# Altium PCB Biocoin_v1.3.PcbDoc (part 2 of 2)
Units mil, origin at the board's own origin, x right, y up, seen from the top; angles counter-clockwise.
Board outline 980.35 x 1027.62 mil, 6 copper layers (Top Signal, GND1, Middle Signal, Power, GND2, Bottom Signal), stack 37.008 mil thick; 101 components, 107 nets, 425 pads, 204 vias.
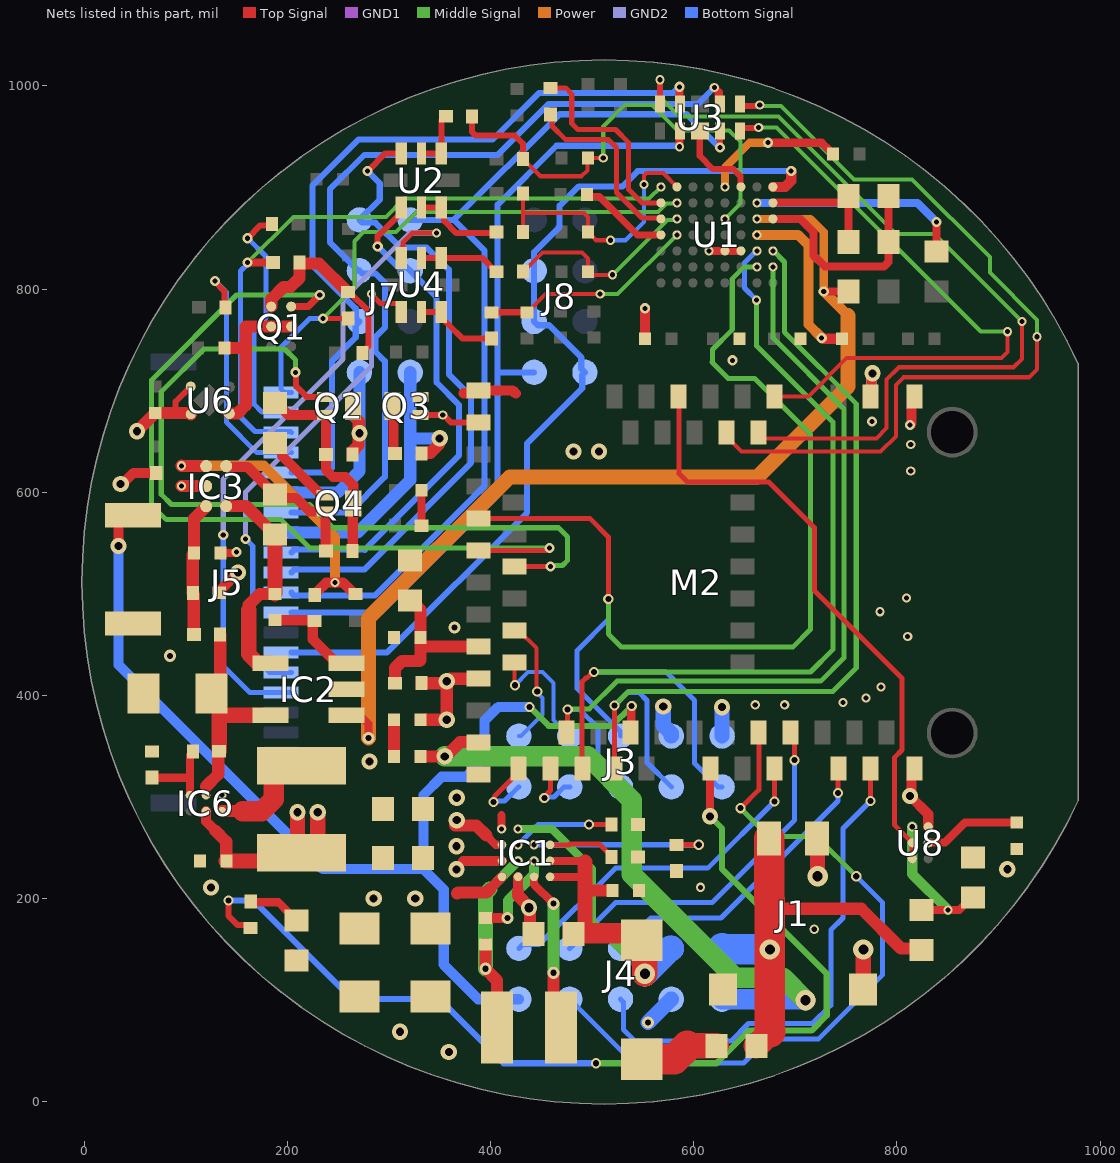
[diagram p6: the nets of this part, all layers, seen from the top]

## Via types
v1: diameter 9, hole 5, Top Signal to Bottom Signal, tented both sides, 75 vias
v2: diameter 10, hole 5, Top Signal to Bottom Signal, tented both sides, 45 vias
v3: diameter 16, hole 8, Top Signal to Bottom Signal, tented both sides, 34 vias
v4: diameter 10, hole 6, Top Signal to Bottom Signal, tented both sides, 22 vias
v5: diameter 12, hole 6, Top Signal to Bottom Signal, tented both sides, 11 vias
v6: diameter 9, hole 5, Top Signal to Bottom Signal, tented bottom, 6 vias
v7: diameter 20, hole 10, Top Signal to Bottom Signal, tented both sides, 5 vias
v8: diameter 10, hole 5, Top Signal to Bottom Signal, tented bottom, 3 vias
v9: diameter 16, hole 9, Top Signal to Bottom Signal, tented both sides, 1 vias
v10: diameter 14, hole 7, Top Signal to Bottom Signal, tented both sides, 1 vias
v11: diameter 14, hole 8, Top Signal to Bottom Signal, tented both sides, 1 vias

## Nets (pads, with @x,y where several pads share a name; then routed paths per layer and width w, separated by ;. In a path a pad name is that pad's centre, name@x,y a point inside that pad or via, vN(x,y) a via of type N, cw(c..) or ccw(c..) an arc to the next point about the centre after c; other vN are vias at no path point) (continued)
GND: C1.1 C5.2 C6.2 C15.2 C16.2 C17.2 C18.2 C19.2 C20.2 C22.2 C23.2 C24.2 C30.2 C31.2 C32.2 C36.2 C37.1 C39.1 D1.1 IC1.A4 IC1.B1 IC2.2 IC3.A2 IC6.B1 J1.2 J1.S1 J1.S2 J3.9 J3.10 M2.1 M2.2 M2.15 M2.33 M2.55 Q3.2 R3.1 R6.2 R14.2 R17.2 R20.1 R28.2 R30.2 S1.2 U1.E4 U1.E5 U1.E6 U8.A2 | length 653
  Top Signal w8: R20.1@64.11,346.91 65.09,346.91 R20.1@67,345 ; C37.1@134.09,540.07 148.53,540.07 149.46,541 v2(150,541) ; v1(135.75,301.87) IC6.B1@135.88,301.87 ; D1.1@204.02,146.32 D1.1@205,146.32 ; R28.2@332,567 C39.1@332,602 ; v1(411,268.62) 411,282 ; U1.E4@615,838 v1(615,837.57) U1.E5@630.75,837.57 U1.E6@646.5,837.57
  Top Signal w10: v3(36,608) 37.62,608 48.62,619 R30.2@71,619 ; 373.47,697.35 381.35,697.35 384.22,700.23 421.77,700.23 425,697 ; 427.13,206.87 IC1.B1@427.13,221.38 ; v2(552,781) 552.09,780.91 C5.2@552.09,751 ; M2.2@773.98,694.32 774.99,695.33 774.99,715.99 v3(776,717) ; v2(813,666) 814.51,667.51 M2.1@814.51,691.54 ; M2.1@814.42,691.45 M2.1@814.51,691.54 ; M2.55@815.06,333.83 816.45,333.83 M2.55@817.61,334.99 ; M2.55@817.29,328.18 814.42,325.31 814.42,304.04 813,302.62 v3(813,301) 830.87,283.13 U8.A2@830.87,270.75 ; M2.1@817.29,694.32 M2.1@814.51,691.54
  Top Signal w12: S1.2@48,470.79 S1.2@48.39,470.39 ; v1(96,606) IC3.A2@120.16,606 ; C18.2@305,340 C15.2@305,376 ; M2.33@382.35,320.4 384.22,322.28 M2.33@388.16,322.28 ; 427.13,206.87 427.13,202.96 438,192.08 v9(438,191) 438.77,190.23 438.77,170.81 442.32,167.26 C19.2@442.32,165
  Top Signal w15: J1.S1@629.1,110.69 J1.S1@629.55,111.14 ; J1.2@721.62,259.31 721.81,259.12 721.81,222.19 v7(722,222) ; J1.S2@766.9,110.69 J1.S2@766.9,110.69 766.95,149.95 v7(767,150)
  GND1 w10: 774,700 774.85,700.85 774.85,715.85 v3(776,717)
  GND2 w10: 774,699 774.85,699.85 774.85,715.85 v3(776,717)
  Bottom Signal w15: v3@570,388.73 570,370.71 578,362.71 J3.9@578,360 ; J3.10@628,360 v3(628,388.43)
  other v1: 718.65,169.84 606.78,211.14 660.59,390.76 689.59,390.76 747,393 769.46,397.39 784.46,408.39 810.65,457.84 783.46,482.39 809.65,495.84 813.65,620.84 813.65,646.84
  other v2: 775.4,669.44 638.31,729.83
  other v3: 359,49 311,69 125,211 908.76,228.93 281,335 570,389 481.77,640 506.77,640
  other v5: 84.53,438.94 364.53,466.94
IONTOPH_E1: J5.15 J7.5 Q2.3 R29.1 | length 224.4
  Top Signal w12: R29.1@264.09,637.89 264.09,640.06 270.23,646.2 v3@270.23,658.32 ; Q2.3@264.62,685 266.5,683.13 266.5,674.12 270.42,670.19 270.42,659.66 v3@271,659.08
  Bottom Signal w12: J5.15@204,599.58 249.58,599.58 271,621 J7.5@271,718
  other v3: 271,658
IONTOPH_E2: J5.13 J7.1 R27.1 | length 300
  Top Signal w12: R27.1@332,638 332,638.8 332.09,638.89 340.88,638.89 349.23,647.25 349.23,652.23 v3(350,653)
  Bottom Signal w12: J5.13@204,560.21 269.21,560.21 321,612 321,653 ; J7.1@321,718 321,653 ; v3@348.92,653 321,653
IONTOPH_NMOS_CTRL: M2.16 Q3.1 | length 60.3
  Top Signal w6: Q3.1@330.94,676.14 331.01,676.07 352.93,676.07 v6(353,676) 353.81,676 361.08,668.73 M2.16@388.16,668.73
IONTOPH_PMOS_CTRL: M2.23 Q2.1 | length 809.8
  Top Signal w5: M2.23@423.59,527 v2(459,527)
  Top Signal w6: v8(208,718) 208.77,717.23 208.77,704.23 219.14,693.86 Q2.1@237.06,693.86 ; M2.23@423.59,527 M2.23@424.09,526.5
  Middle Signal w5: v8(208,718) 208,730.3 197.3,741 118,741 76,699 76,598 86,588 222,588 245,565 467,565 476,556 476,533 470.96,527.96 459.96,527.96 v2(459,527)
LED: M2.44 R11.1 | length 1007.8
  Top Signal w6: v4(142,198) 142,182.97 151.07,173.91 161.09,173.91 R11.1@164,171
  Top Signal w8: v3(616,281) 616.25,281.25 616.25,327.93 M2.44@616.5,328.18
  Middle Signal w6: v4(504.01,38) 622.34,38 654.34,70 716,70 731,85 731,126 628,229 628,269 v3(616,281)
  Bottom Signal w6: v4(142,198) 167,198 264,101 350,101 413,38 v4(504.01,38)
MCU_RESET: J4.1 M2.40 S1.1 | length 1108.6
  Top Signal w8: M2.40@537.76,363.61 538.62,364.47 538.62,389.12 v4(539,389.5)
  Top Signal w10: v3(34,547) 34,570.21 41,577.21 S1.1@48,577.21
  Middle Signal w6: v4(438.46,388.74) 457.19,370 519.5,370 v4(539,389.5)
  Bottom Signal w10: v3(34,547) 34,430 235,229 334,229 ; J4.1@428,101 388,101 354,135 354,209 334,229 ; v4(438.46,388.74) 407.74,388.74 394.19,375.19 394.19,338.19 376,320 352,320 334,302 334,229
MCU_UART_RX: J4.6 M2.48 | length 343.1
  Top Signal w5: v4(679.44,295.67) M2.48@679.44,327.37
  Bottom Signal w5: J4.6@428,151 431.83,154.83 447.83,154.83 523,230 613.77,230 v4(679.44,295.67)
MCU_UART_TX: J4.7 M2.49 | length 364.2
  Top Signal w5: v4(699.17,336.25) M2.49@699.17,367.94
  Bottom Signal w5: J4.7@478,151 523,196 618,196 699.17,277.17 v4(699.17,336.25)
MCU_VDD: C16.1 C17.1 M2.28 R1.2 | length 171.6
  Top Signal w12: R1.2@305.7,412.3 R1.2@306,412 306,426.97 313.03,434 330.05,434 331,434.95 331,445.97 ; C16.1@316.61,497.7 C16.1@321,493.32 321.98,493.32 331,484.3 C17.1@331,457 331,445.97 ; M2.28@388.16,448.26 333.29,448.26 331,445.97
  Top Signal w15: M2.28@387.78,447.89 M2.28@388.16,448.26
MUXA0: M2.7 U3.1 | length 818.2
  Top Signal w4: M2.7@632.25,658.89 632.25,654.95 647.13,640.08 784.08,640.08 799,655 799,705.62 806.52,713.13 930.13,713.13 938,721 v1(938,753)
  Top Signal w6: U3.1@645.38,980.19 663.65,980.19 664.46,981 v1(665,981)
  Middle Signal w4: v1@666.08,981 v1(665,981) 665.77,980.23 685.78,980.23 758.02,908 815,908 891.5,831.5 891.5,816.18 938,769.68 v1(938,753)
MUXA1: M2.4 U3.10 | length 619.4
  Top Signal w4: M2.4@679.5,694.32 712.9,694.32 750.58,732 903,732 909,738 v1(909,758)
  Top Signal w6: U3.10@646.19,954.62 645.38,953.81 645.38,956.62 647.38,958.62 663.62,958.62 v1(664,959)
  Middle Signal w4: v1(664,959) 681.56,959 882.56,758 v1(909,758)
MUXEN: M2.5 U3.5 | length 849.6
  Top Signal w4: M2.5@663.75,658.89 669.62,653 780,653 790,663 790,711 802,723 915,723 923,731 v1(923,768)
  Top Signal w6: U3.5@566.62,980.19 566.81,980.38 566.81,1005.81 v1(567,1006)
  Middle Signal w4: v1(567,1006) 567,989 586,970 683.29,970 799.29,854 837,854 v1(923,768)
NetC21_1: C21.1 IC1.B2 L3.2 | length 219.8
  Top Signal w12: C21.1@395,155 v5(395,131) 406.5,119.5 L3.2@406.5,73 L3.2@396.76,82.75
  Middle Signal w10: 399.35,209.35 v1(427,237)
  Middle Signal w15: v5(395,131) 395,205 399.35,209.35
NetC21_2: C21.2 IC1.C2 | length 88.7
  Top Signal w10: C21.2@395,181 v5(416.85,181)
  Middle Signal w10: v5(416.85,181) 417.23,181.38 417.23,198.23 443,224 v1(443,237)
NetC38_1: C38.1 IC2.3 R23.1 | length 99
  Top Signal w10: C38.1@188,474 225.02,474 225.02,455.23 248.65,431.59 IC2.3@258.4,431.59
NetC38_2: C38.2 IC2.4 IC3.B1 RSENSE.1 | length 222.3
  Top Signal w12: IC3.B1@139.84,586.32 159.37,586.32 182.19,563.5 182.19,563.14 187.33,558 RSENSE.1@187.68,558 ; 162,484 162,489 172.91,499.91 187.91,499.91 C38.2@188,500
  Top Signal w15: 162,484 162,440.75 170.79,431.96 183.22,431.96 IC2.4@183.6,431.59 ; C38.2@188,500 RSENSE.1@188,558.32
NetD1_2: D1.2 R11.2 | length 52.9
  Top Signal w8: R11.2@164,196.41 191.28,196.41 201.19,186.5 201.19,185.51 208.02,178.68 D1.2@209,178.68
NetIC1_B3: IC1.B3 R6.1 | length 100.3
  Top Signal w5: v4(497,273) R6.1@519,273
  Bottom Signal w5: v1(427,253) 427.06,253 447.06,273 v4(497,273)
NetIC1_C1: IC1.C1 L3.1 | length 168.6
  Top Signal w8: IC1.C1@442.87,221.38 442.97,221.28 442.97,214.03 v5(462,195)
  Top Signal w12: v5(462,127) 462,80.5 L3.1@469.5,73
  Top Signal w15: L3.1@469.5,73 L3.1@476,79.5
  Middle Signal w12: v5(462,127) v5(462,195)
NetIC1_C3: IC1.C3 R17.1 | length 184
  Top Signal w5: R17.1@583,253 v4(605,253)
  Bottom Signal w5: v1(443,253) v4(605,253)
NetIC1_D3: IC1.D3 R14.1 | length 66.5
  Top Signal w5: IC1.D3@458.62,252.87 477.29,252.87 478.04,253.63 507.36,253.63 519,241.98 R14.1@519,241
NetIC3_A3: IC3.A3 R23.2 R25.1 | length 299.2
  Top Signal w10: R23.2@227,499 228.3,500.3 228.3,500.89 238.41,511 v1(247,511) 255.02,511 266.02,500 R25.1@267,500
  Top Signal w12: v1(96,626) 96.13,625.87 119.97,625.87 IC3.A3@120.16,625.68
  Power w10: v1(96,626) 177,626 247,556 v1(247,511)
NetIC3_B3: IC3.B3 Q4.2 R24.2 RSENSE.2 | length 155.9
  Top Signal w10: IC3.B3@139.84,625.68 140.41,625.11 142.53,625.11 142.73,624.92 160.77,624.92 181.19,604.5 181.19,603.51 190.28,594.42 208.58,594.42 222,581 237.44,581 237.5,580.94 237.5,542.5 R24.2@238,542
NetIC6_A1: IC6.A1 L1.2 | length 111.4
  Top Signal w12: IC6.A1@135.75,286.13 155.87,286.13 156,286
  Top Signal w20: 156,286 175,286 186.72,297.72 186.72,322.5 195.13,330.91 L1.2@214,330.91
NetIC6_B3: IC6.B3 R18.1 R20.2 | length 82.6
  Top Signal w8: R20.2@67,319 101.68,319 104.25,321.57 ; IC6.B3@104.25,301.87 104.25,321.57 ; R18.1@107,345 107,344.02 104.25,341.27 104.25,321.57
NetQ2_2: Q2.2 Q4.3 R24.1 R26.2 R29.2 | length 207.6
  Top Signal w10: R26.2@188,688 188.98,688 200.84,676.14 Q2.2@237.06,676.14 237.92,676.14 238,676.06 R29.2@238,637 238,622 245,615 257,615 265,607 Q4.3@265,589 264.5,588.5 264.5,542.5 R24.1@264,542
NetQ3_3: Q3.3 R27.2 | length 49.1
  Top Signal w10: Q3.3@303.38,685 304.69,683.69 304.69,639.3 R27.2@306,638 R27.2@306.69,637.31
NetQ4_1: Q4.1 R26.1 | length 74.5
  Top Signal w10: R26.1@188,648.63 188.98,648.63 194.81,642.8 194.81,635.79 233.6,597 Q4.1@237,597
NetR2_1: R2.1 R3.2 U8.A1 | length 152.8
  Top Signal w8: R2.1@824,188.68 861.39,188.68 874.02,201.32 R3.2@875,201.32
  Middle Signal w10: v1(815.13,270.75) 815.13,224.08 v1(850.44,188.77)
NetR4_2: R4.2 U2.1 U2.2 | length 57.7
  Top Signal w6: U2.2@332,933.57 U2.1@351.68,933.57 351.68,966.28 R4.2@355.41,970
NetR7_2: R7.2 U2.6 U2.7 | length 91.1
  Top Signal w6: U2.6@332,880.43 U2.7@351.68,880.43 354.34,877.78 354.34,867.19 366.52,855 405,855 R7.2@406,856
NetR21_2: R21.2 U4.1 U4.2 | length 79.6
  Top Signal w6: U4.2@332,830.57 391.83,830.57 405.41,817 R21.2@406,817
NetR22_2: R22.2 U4.6 U4.7 | length 83.1
  Top Signal w6: U4.6@332,777.43 U4.7@351.68,777.43 351.68,772.25 359.1,764.83 359.1,764.6 372.61,751.09 R22.2@401,751.09
PH0: J5.11 J7.8 U2.3 | length 631.1
  Top Signal w6: v2(279,916) 296.57,933.57 U2.3@312.32,933.57
  Bottom Signal w6: J5.11@204,520.84 206.91,523.75 275.75,523.75 381,629 381,694 359,716 359,819 337,841 311,841 286.7,865.3 273.7,865.3 J7.8@271,868 291,888 291,904 v2(279,916)
PH0_Amp_Out: C12.1 R4.1 R5.1 U1.C5 | length 457.2
  Top Signal w4: R5.1@432,928 432,927.02 435.91,923.11 436.89,923.11 449,911 489.66,911 495.36,916.7 495.36,926.36 498,929 v1(511,929)
  Top Signal w6: R4.1@382,970 382,954.51 385.51,951 423.99,951 432,942.99 R5.1@432,928
  Middle Signal w4: v1(511,929) 511,960 532,981 559,981 584,956 635,956 646,945 646,884.32 v1(630.75,869.06) v1@630.75,868.75
PH1: J5.12 J7.3 U2.5 | length 496.6
  Top Signal w6: v2(289,842) 289,851.93 312.32,875.25 U2.5@312.32,880.43
  Bottom Signal w6: J5.12@204,540.53 206.91,543.43 276.02,543.43 276.22,543.22 369,636 369,686 347,708 347,792 J7.3@321,818 317.36,821.64 309.36,821.64 v2(289,842)
PH1_Amp_Out: C27.1 R7.1 R8.1 U1.A2 | length 269.4
  Top Signal w4: R7.1@432,856 432,875 ; R8.1@432,894 432,875 ; v1(518,848) 504,848 500.3,851.7 499.91,851.7 496,855.61 C27.1@496,856 496,871 493.99,873.01 492,875 432,875 ; v1(551,903) 551,911.66 553.34,914 570.06,914 U1.A2@583.5,900.56
  Bottom Signal w4: v1(518,848) 533,848 551,866 v1(551,903)
PH2: J5.6 U4.5 | length 495.8
  Top Signal w5: v1(283,795) 283,794.54 291.78,785.75 309.16,785.75 312.32,782.6 U4.5@312.32,777.43
  GND2 w5: v2(159,554) 159,600 283,724 v1(283,795)
  Bottom Signal w5: v2(159,554) 166,547 166,437.73 174.03,429.7 175.35,429.7 182.63,422.42 J5.6@194,422.42 J5.6@204,422.42
PH2_Amp_Out: C34.1 R22.1 U1.D2 | length 214.5
  Top Signal w4: C34.1@436,777.09 436.39,777.09 454.3,795 v1(508,795)
  Top Signal w6: R22.1@401,777.09 C34.1@436,777.09
  Middle Signal w4: v1(508,795) 525.19,795 v1(583.5,853.32)
  Bottom Signal w6: v1@583.19,853 v1(583.5,853.32)
PH3: J5.5 U4.3 | length 659.5
  Top Signal w5: U4.3@312.32,830.57 313.97,832.23 313.97,845.97 323,855 v1(347,855)
  GND2 w5: v2(137,558) 137,613 255,731 255,790 320,855 v1(347,855)
  Bottom Signal w5: v2(137,558) 137,429 163.27,402.73 J5.5@204,402.73
PH3_Amp_Out: C33.1 R21.1 U1.C2 | length 199.1
  Top Signal w4: R21.1@432,817 432,817.98 435.91,821.89 436.89,821.89 451,836 490,836 491.99,834.01 496,830 C33.1@496,817.39 ; C33.1@496,817 C33.1@496,817.39 ; v1(520,814) 499.39,814 C33.1@496,817.39
  Middle Signal w4: v1(520,814) 574.04,868.04 582.04,868.04 v1@583,869
  other v1: 583.5,869
RC0_0: CTIA1.1 RTIA1.1 U1.C8 | length 215.1
  Top Signal w8: U1.C8@678.18,868.87 U1.C8@677.99,869.06 704.94,869.06 718,856 718,833 729,822 787.25,822 791.94,826.69 CTIA1.1@791.94,846.32 ; CTIA1.1@791,845.38 CTIA1.1@791.94,846.32 ; RTIA1.1@791.94,891.32 CTIA1.1@791.94,846.32
RC0_1: CTIA1.2 RTIA1.2 U1.B8 | length 122.3
  Top Signal w8: U1.B8@677.99,884.81 678.18,885 746.25,885 RTIA1.2@752.57,891.32 CTIA1.2@752.57,846.32
RCAL0: RCAL1.2 U1.C1 | length 183.1
  Top Signal w5: RCAL1.2@459,972 460.46,970.54 460.46,960.54 474,947 516.17,947 524,939.17 524,895 549.17,869.83 566.99,869.83 U1.C1@567.76,869.06
RCAL1: RCAL1.1 U1.B1 | length 197.6
  Top Signal w5: RCAL1.1@461,998 474,998 480,992 480,963 486,957 523.08,957 536,944.08 536,898 549.19,884.81 U1.B1@567.76,884.81
RE0: J5.7 J8.1 J8.6 J8.7 U1.A8 | length 924.3
  Top Signal w10: U1.A8@677.99,900.56 690.14,900.56 696,906.42 v2(696,916)
  Bottom Signal w6: J5.7@204,442.1 298.1,442.1 436,580 436,648 490.3,702.3 490.3,715.3 J8.1@493,718 489.36,721.64 489.36,732.64 457.64,764.36 446.64,764.36 J8.6@443,768 J8.7@443,818 443,836.22 468,861.22 468,882 487,901 530,901 545,916 v2(696,916)
SCL: J3.6 M2.27 | length 128.4
  Top Signal w4: M2.27@423.59,464.01 427.53,464.01 445.1,446.44 445.1,404.9 v4(446,404)
  Bottom Signal w4: J3.6@428,360 430,360 451,381 451,397.38 446,402.38 v4(446,404)
SDA: J3.7 M2.29 | length 129.2
  Top Signal w4: M2.29@423.59,432.51 423.59,410.41 v4(424,410)
  Bottom Signal w4: v4(424,410) 437,423 451,423 462,412 462,376 J3.7@478,360
SE0: U1.A6 U3.8 | length 81.7
  Top Signal w6: U3.8@606,953.81 606,931 619,918 639,918 646,911 646,901.06 U1.A6@646.5,900.56
SPI_Board_CLK: J3.3 M2.36 U1.F8 | length 834.2
  Top Signal w5: M2.36@474.77,363.61 476,364.84 v4(476,386)
  Middle Signal w5: v4(476,386) 476.82,386.82 497.32,386.82 524.5,414 725,414 748,437 748,682 677.99,752.01 v1@677.99,821.64
  Bottom Signal w5: v4(476,386) 488,386 506,368 506,332 J3.3@528,310
  other v1: 677.99,821.82
SPI_Board_CS: J3.8 M2.20 U1.F7 | length 1046
  Top Signal w5: M2.20@388.16,574.24 497.76,574.24 516,556 v4(516,495)
  Middle Signal w5: v4(516,495) 516,460.5 529,447.5 697.5,447.5 715,465 715,657 660,712 634,712 618,728 618.5,728.5 618.5,740.5 638,760 638,810 649.82,821.82 v1(662.24,821.82)
  Bottom Signal w5: v4(516,495) 516,475 485.07,444.07 485.07,407.07 528,364.14 J3.8@528,360
SPI_Board_MISO: J3.4 M2.39 U1.E8 | length 895.8
  Top Signal w5: M2.39@522.01,328.18 v4(522,390)
  Middle Signal w5: v4(522,390) 522,390.18 535.75,403.93 736.93,403.93 760,427 760,687 689.49,757.51 689.49,826.58 678.51,837.57 v1(677.99,837.57)
  Bottom Signal w5: v4(522,390) 522,390.18 534.82,403 546,403 554,395 554,334 J3.4@578,310
SPI_Board_MOSI: J3.5 M2.37 U1.E7 | length 989
  Top Signal w5: M2.37@490.52,328.18 490.14,328.56 490.14,413.47 493.68,417 494.65,417 500.65,423 v4(502,423)
  Middle Signal w5: v4(502,423) 715,423 737,445 737,669 662,744 v1(662,789) ; v1@661.73,837.57 v1(662.24,837.57)
  Bottom Signal w5: v4(502,423) 573,423 601,395 601,333 624,310 J3.5@628,310 ; v1(662,789) 650,801 650,825.84 661.73,837.57 v1(662.24,837.57)
STRAIN+: J5.20 R10.2 U1.B2 | length 552.6
  Top Signal w5: v2(235,771) R10.2@260,771
  Middle Signal w4: v2(235,771) 266,802 266,847 275,856 307,856 327,876 565,876 573,884 582.7,884 v1(583.5,884.81)
  Bottom Signal w5: J5.20@204,698.01 197.41,698.01 194,701.41 194,743 222,771 v2(235,771)
STRAIN-: J5.19 R16.1 | length 246.3
  Top Signal w6: v2(161,850) 173.61,862.61 183.61,862.61 R16.1@185,864
  Bottom Signal w5: v2(161,850) 179,832 179,772 167,760 167,687 175,679 203.32,679 204,678.32 J5.19@203.68,678
SWCLK: J4.3 M2.53 | length 503.6
  Top Signal w5: v4(774,296) M2.53@773.98,328.18
  Bottom Signal w5: J4.3@528,101 531,98 531,71 542,60 637,60 654,77 717,77 735,95 735,169 747,181 747,269 v4(774,296)
SWDIO: J4.8 M2.51 | length 306.4
  Top Signal w5: v4(742,304) 742,327.69 M2.51@742.49,328.18
  Bottom Signal w5: J4.8@528,151 557.91,180.91 626.91,180.91 742,296 v4(742,304)
SWO: J4.2 M2.47 | length 696.2
  Top Signal w5: v4(646,289) 664.17,307.17 664.17,313.21 664.12,313.26 664.12,343.1 664.17,343.15 M2.47@664.17,357.94
  Middle Signal w5: v4(646,289) 674,261 721,261 v4(760,222)
  Bottom Signal w5: J4.2@478,101 541,38 649,38 673,62 723,62 786,125 786,196 v4(760,222)
TEMP+: J5.18 R9.2 U1.A1 | length 674
  Top Signal w8: v2(161,826) R9.2@186,826 R9.2@185.92,825.92
  Middle Signal w4: v2(161,826) 206,871 297,871 315,889 556.2,889 v1(567.76,900.56)
  Bottom Signal w5: v2(161,826) 161,824.65 154,817.65 154,674 168.29,659.71 202.93,659.71 J5.18@204,658.64
TEMP-: J5.17 R15.1 | length 250.1
  Top Signal w6: v2(129,808) 129,806.92 138.03,797.89 138.03,782.97 R15.1@139,782
  Bottom Signal w5: v2(129,808) 140,797 140,669 170.05,638.95 J5.17@204,638.95
TEMP_VDD: Q1.A1 R9.1 R10.1 R31.1 | length 190
  Top Signal w6: R10.1@260,797 260.98,797 280,777.98 280,743.98 274,737.98 R31.1@274,737
  Top Signal w12: Q1.A1@184.16,782.68 184.16,789.97 196.19,802 203,802 211.91,810.91 R9.1@211.91,825.3 ; R9.1@212,826 211.91,825.91 R9.1@211.91,825.3 ; R10.1@260,797 259.2,797 231.09,825.11 212.09,825.11 R9.1@211.91,825.3
TEMP_VDD_CTRL: M2.22 Q1.A2 | length 835.8
  Top Signal w5: M2.22@388.16,542.75 454.39,542.75 456.65,545 v2(458,545)
  Top Signal w7: Q1.A2@203.84,782.68 220.68,782.68 v8(232,794)
  Middle Signal w5: v8(232,794) 150,794 66.5,710.5 66.5,587.5 81,573 194,573 222,545 v2(458,545)
USB_+5V: C18.1 J4.5 M2.32 | length 642.6
  Top Signal w12: C18.1@331,340 v3(355,340) 356.08,340 370.08,354 387.93,354 M2.32@388.16,353.77
  Middle Signal w20: v3(355,340) 496,340 539,297 539,224 641,122 688,122 v7(710,100)
  Bottom Signal w20: J4.5@628,101 709,101 v7(710,100)
USB_N: J3.1 M2.34 | length 80.9
  Top Signal w5: v4(403,295) 403.96,295.96 403.96,300.67 427.53,324.24 M2.34@427.53,328.18 M2.34@432,332.65
  Bottom Signal w5: v4(403,295) 403.96,295.96 413.76,295.96 427.8,310 J3.1@428,310
USB_P: J3.2 M2.35 | length 68.8
  Top Signal w5: v4(453,299) 453,300.35 459.02,306.38 M2.35@459.02,328.18 M2.35@453.65,322.81
  Bottom Signal w5: v4(453,299) 453.96,299.96 462.54,299.96 472.59,310 J3.2@478,310
VBAT: J1.1 J4.10 R2.2 R13.2 | length 424
  Top Signal w12: 674.38,199 674.69,199 ; 674.69,190 765,190 804,151 822.32,151 R2.2@824,149.32
  Top Signal w25: R13.2@661.68,55 675.18,68.49
  Top Signal w30: 674.38,199 J1.1@674.38,259.31 ; 674.69,199 674.69,150.31 v7(675,150) 675,68.67 675.18,68.49
  Bottom Signal w30: J4.10@628,151 629,150 v7(675,150)
VBIAS0: C11.2 IC2.1 U1.C7 | length 986.3
  Top Signal w8: IC2.1@258.4,380.41 262.03,376.79 275.31,376.79 280,372.1 v5(280,358) ; v2(727.99,797.65) C11.2@757.56,797.65
  Power w8: v1(662.24,869.06) 714.94,869.06 727.99,856.01 v2(727.99,797.65)
  Power w10: v2(727.99,797.65) 752,773.64
  Power w15: v5(280,358) 280,476 419,615 663,615 752,704 752,773.64
VBIAS_CAP: C10.2 U1.D1 | length 89.2
  Top Signal w7: C10.2@495,893 497.03,890.97 507.03,890.97 544.69,853.32 U1.D1@567.76,853.32
VBUS: C19.1 C20.1 C30.1 IC1.B4 IC1.D1 IC1.D2 IC6.A2 J2.1 J4.9 L1.1 | length 730.5
  Top Signal w8: IC1.D1@458.62,221.38 492,221.38 ; IC1.D2@458.62,237.13 484.87,237.13 485,237 494,237
  Top Signal w10: IC6.A2@120,286.13 120,276 129,267
  Top Signal w12: 129,267 140,256 C30.1@140,237 ; 493,208 C20.1@520,208
  Top Signal w15: C30.1@140,237 205.91,237 L1.1@214,245.09 210,249.09 v3(210,285) ; v3(230,285) 230,254.09 L1.1@236,248.09 ; C19.1@481.68,165 482.68,166 C19.1@482.68,166.98 ; 493,165 493,166 493,208 493,236
  Top Signal w20: C19.1@482.68,166 493,166 546,166 J2.1@551,161
  Top Signal w25: v7(552,126) J2.1@552,151
  Middle Signal w8: v1(427.13,268.62) 460.38,268.62 500,229 500,178 v7(552,126)
  Bottom Signal w25: v7(552,126) 577,151 J4.9@578,151
VDD: C15.1 C31.1 C32.1 IC1.A3 J4.4 M2.30 R1.1 U8.B2 | length 304.4
  Top Signal w8: 396,262 405.03,252.97 411.28,252.97 IC1.A3@411.38,252.87 ; v1(830.87,255) 831.07,255.19 847.19,255.19 867,275 C32.1@918,275
  Top Signal w12: C15.1@331,376 v3(357,376) v3(357,414) ; R1.1@332,412 353.92,412 355.92,414 v3(357,414) ; v3@365,272 386,272 396,262 ; M2.30@387.78,416.39 360.47,416.39 358.08,414 v3(357,414)
  Top Signal w15: M2.30@387.78,416.39 M2.30@388.16,416.76
  Bottom Signal w15: v5(555,78) J4.4@578,101
  other v3: 366.8,277.21 366.8,299.21
VDD_AUX: C24.1 IC1.A2 R12.2 | length 66.3
  Top Signal w10: R12.2@133,501 133.59,501 134.89,502.3 134.89,504.39 v3(151.5,521) ; 373.13,237.13 IC1.A2@411.38,237.13
  other v3: 366.63,228.83 366.6,251.49
VDD_BOOSTOUT: C36.1 IC2.5 IC6.B2 R18.2 R19.1 | length 196.2
  Top Signal w8: IC6.B2@120,301.87 120,310.29
  Top Signal w12: 120,310.29 132.11,322.4 132.11,344.7 132.41,345 R18.2@133,345 ; C36.1@125.46,402 134,410.54 R19.1@134,460
  Top Signal w15: R18.2@133,345 133,380 133.41,380.41 IC2.5@183.6,380.41
VDD_LDOIN: C22.1 C23.1 C29.1 IC1.A1 U6.3 U6.4 | length 148.4
  Top Signal w6: 90,678 90,689 U6.3@105,704
  Top Signal w10: 400,210 IC1.A1@411.38,221.38
  Top Signal w12: v3(52,660) 69.7,677.7 69.7,677.91 69.8,678 90,678 103.79,678 U6.4@105,676.79 ; 367,205 368,206 396,206 400,210
  Top Signal w15: C22.1@341,170.46 C22.1@344.94,170.46
  other v3: 285,200 326,200
VDD_LDOOUT: C28.1 Q1.B1 Q1.B2 U6.1 | length 160.8
  Top Signal w12: C28.1@138,742 159.07,742 ; U6.1@142.96,677.4 150.97,677.4 159.07,685.5 159.07,742 ; 159,763 Q1.B1@184.16,763 Q1.B2@203.84,763 ; 159.07,760.93 159.07,742
VDD_Sense: C37.2 IC3.A1 R12.1 R19.2 | length 132.2
  Top Signal w12: R19.2@108,460 108,499.2 107,500.2 R12.1@107,501 107,538.77 108.09,539.87 C37.2@108.09,540.07 108.09,573.98 120.16,586.05 IC3.A1@120.16,586.32
VDIV: M2.10 U8.B1 U8.C1 | length 603.6
  Top Signal w5: M2.10@585.01,694.32 585.38,693.95 585.38,618.62 594,610 674,610 719,565 719,503 805.11,416.89 805.11,346.29 797.5,338.68 797.5,272.63 U8.B1@815.13,255 U8.C1@815.13,239.25
VIN: J2.2 R13.1 | length 78.7
  Top Signal w25: 593.89,55 R13.1@622.32,55
  Top Signal w30: J2.2@549,42 580.89,42 593.89,55
VREF_1V8: C8.2 U1.A5 | length 140.3
  Top Signal w8: v2(673,944) 726,944 734.7,935.3 735.09,935.3 737,933.39 C8.2@737,933
  Power w8: v1(630.75,900.5) 630.75,919.75 655,944 v2(673,944)
VREF_2V5: C7.2 U1.D7 | length 171.9
  Top Signal w10: v2(726,751.87) 726.87,751 C7.2@746.09,751
  Power w10: v1(662.24,853.32) 702.68,853.32 713,843 713,803.87 712.99,765.01 v2@726,752
VZERO0: C9.2 U1.B7 | length 214.1
  Top Signal w8: C9.2@839,836.75 v2(839,866) v2@839,866.32
  Bottom Signal w8: v1(662.24,884.81) 820.19,884.81 v2(839,866)
WE1: J5.14 J7.7 U3.2 | length 872.9
  Top Signal w8: v1(620.31,998.32) 620.31,998.05 624.69,993.68 U3.2@624.69,987.69 ; U3.2@625.65,979.57 625.37,981.93 625.23,983.13 U3.2@625.16,983.72 ; U3.2@625.69,983.19 U3.2@625.16,983.72 ; U3.2@624.69,987.69 624.69,984.19 U3.2@625.16,983.72 ; U3.2@624.69,987.69 U3.2@625.16,983.72
  Bottom Signal w6: J5.14@204,579.9 260.9,579.9 296,615 296,729 287,738 287,753 296,762 296,806 286.7,815.3 273.7,815.3 J7.7@271,818 270.07,818 242,846.07 242,898 276,932 407,932 457,982 603.99,982 v1(620.31,998.32)
WE2: J5.9 J8.5 U3.7 | length 790.2
  Top Signal w8: v1(586,940) 586.16,940.16 586.16,953.24 U3.7@586.27,953.35
  Bottom Signal w6: J5.9@204,481.47 291.47,481.47 407,597 407,717 ; J8.5@443,718 408,718 407,717 ; v1(586,940) 585.43,940.57 583.3,940.57 582.88,941 465,941 407,883 407,717
WE3: J5.16 J7.6 U3.4 | length 770.3
  Top Signal w8: v2(586,999) 586.16,998.84 586.16,980.34 U3.4@586.31,980.19
  Bottom Signal w6: J5.16@204,619.27 239.27,619.27 244,624 244,729 267.36,752.36 267.36,764.36 J7.6@271,768 267.36,771.64 267.36,780.64 225,823 225,902 270,947 402,947 448,993 580,993 v2(586,999)
WE4: J5.10 J7.4 U3.9 | length 888.3
  Top Signal w6: v2(626,939.23) U3.9@626,955.62
  Bottom Signal w6: J5.10@204,501.16 206.91,498.25 286.25,498.25 394,606 394,838 364,868 ; J7.4@321,868 364,868 ; v2(626,939.23) 625.77,939.23 593,972 468,972 364,868
pads on no net: J5.1 J5.S1 J5.S2 J7.2 M2.3 M2.6 M2.8 M2.9 M2.17 M2.18 M2.31 M2.42 M2.43 M2.45 M2.46 M2.50 M2.52 M2.54 M2.56 M2.57 M2.58 M2.59 M2.60 M2.61 U1.C3 U1.C6 U1.D3 U1.D4 U1.F4 U1.F6 U1.G1 U1.G4 U1.G5 U1.G6 U1.G8 U8.C2

## Polygon pours and split planes (outlines as drawn)
GND on Top Signal "Top Signal-GND 1" (solid, remove dead copper, pour order 111): 513.94,9.98 ccw(c507.96,522.58) 959.04,279 959.04,711.13 711,711.13 711,755 687,755 687,842 542,842 542,711.13 356.87,711.13 356.74,711 180,711 180,619 23.53,619 ccw(c513.94,511.94)
AGND on Top Signal "Top Signal-GND" (solid, remove dead copper, pour order 103): 149.07,739 519,739 519,849 722,849 722,739 961.63,739 ccw(c513.93,511.92) 513.94,1013.91 ccw(c513.93,511.96) 26.79,633 149.07,633
VDD_AUX on Top Signal "Top Signal-VDD_AUX" (solid, remove dead copper, pour order 97): 378,218.21 378,218.29 395.6,231.4 395.6,243.4 378,261 378,261.21 314,261.21 314,218.21
VDD_LDOIN on Top Signal "VDD_LDOIN_L01_P101" (solid, remove dead copper, pour order 101): 378,212 236,212 236,137 378,137
VDD on Top Signal "VDD_L01_P099" (solid, remove dead copper, pour order 99): 314,309 378,309 378,289 378,266 314,266
GND on GND1 "GND1-GND" (solid, remove dead copper, pour order 96): 513.5,9.9 ccw(c507.52,522.5) 958.6,278.92 958.6,711.05 687.01,711.05 687.01,841.85 542.01,841.85 542.01,711.05 183,711.05 183,620 23.32,620 ccw(c513.5,511.86)
AGND on GND1 "AGND_L02_P106" (solid, remove dead copper, pour order 106): 149,642 149,739.07 518.55,739.07 518.55,849.07 721.55,849.07 721.55,739.07 961.17,739.07 ccw(c513.48,512) 513.49,1013.99 ccw(c513.48,512.03) 28.64,642
VDD on Power "Power-VDD" (solid, remove dead copper, pour order 114): 692,52 692,211 855,211 855,265 824,265 824,432 341,432 341,266 591,266 591,103 524,103 524,52
VDD_AUX on Power "VDD_AUX_L04_P115" (solid, remove dead copper, pour order 115): 378,218 329,218 134,413 134,534 166,534 166,430 335,261 378,261
VDD_LDOIN on Power "VDD_LDOIN_L04_P112" (solid, remove dead copper, pour order 112): 345,179 211,179 40,350 40,672 75,672 75,368 228,215 345,215
AFE_AVDD on Power "Power-AFE_AVDD" (solid, remove dead copper, pour order 107): 163,764 519,764 519,860 568,909 568,976 330,976 163,852
GND on GND2 "GND_L05_P105" (solid, remove dead copper, pour order 105): 513.58,9.81 ccw(c507.59,522.42) 958.67,278.83 958.67,710.97 687.08,710.97 687.08,841.76 542.08,841.76 542.08,710.97 542.08,330 132.63,330 45.68,330 ccw(c513.58,511.78)
AGND on GND2 "Top Signal-GND" (solid, remove dead copper, pour order 104): 149,738.83 518.63,738.83 518.63,848.83 721.63,848.83 721.63,738.83 961.26,738.83 ccw(c513.56,511.76) 513.58,1013.75 ccw(c513.56,511.79) 26.46,633 149,633
VBUS on Middle Signal "VBUS_L03_P116" (solid, remove dead copper, pour order 116): 196,297 241,297 241,202 331,112 497,112 531,146 570,146 570,109 533,72 303,72 196,179

## Keep-outs
Keep-Out Layer:
  lines w10: 0,505 2,469 7,429 21,368 43,307 70,254 100,208 140,160 188,116 248,74 303,45 352,26 413,10 471,2 522,0 569,3 613,10 660,22 698,35 730,49 758,63 790,82 826,108 852,129 874,150 898,176 918,200 933,220 951,248 963,270 977,299 977,726 952,774 926,813 905,840 882,865 859,888 842,903 821,920 794,939 741,970 705,986 664,1001 639,1008 612,1014 588,1018 555,1022 530,1024 494,1024 454,1021 413,1015 342,995 304,980 274,965 247,950 196,915 159,883 130,853 107,825 91,803 77,781 59,750 47,726 32,691 19,649 9,607 3,566 1,539 0,505

## Other copper
Top Signal:
  pour cut-out: 824,265 960,265 977,299 977,725 960,758 824,758
  pour cut-out: 777,603 777,538 826,538 826,603
GND1:
  pour cut-out: 824,265 960,265 977,299 977,725 960,758 824,758
Middle Signal:
  pour cut-out: 824,265 960,265 977,299 977,725 960,758 824,758
Power:
  pour cut-out: 824,265 960,265 977,299 977,725 960,758 824,758
GND2:
  pour cut-out: 824,265 960,265 977,299 977,725 960,758 824,758
Bottom Signal:
  pour cut-out: 824,265 960,265 977,299 977,725 960,758 824,758

## Silkscreen, mask and mechanical layers (free items; w line width, h text height)
Top Overlay:
  circle w9.84: c225.07,115.79 r0.23
Bottom Overlay:
  text "Biocoin" at 620,585 h70
  text "UCSD BioEE Group" at 759,457 h60
  text "TH, Rev 1.3" at 623,219 h40

## Text inside footprints (layer, text, board x,y; h text height)
J2: Top Overlay "*" at 580,185.5 h19.68 r270; Mechanical 13 "*" at 524,160 h50 r270
M2: Mechanical 2 "No ground pad" at 904.89,621.54 h17.72 r270; Mechanical 3 "Toplayer no ground pad" at 729.69,645.11 h11.81 r270